# Allegro board pc049a_4lemos_02.brd
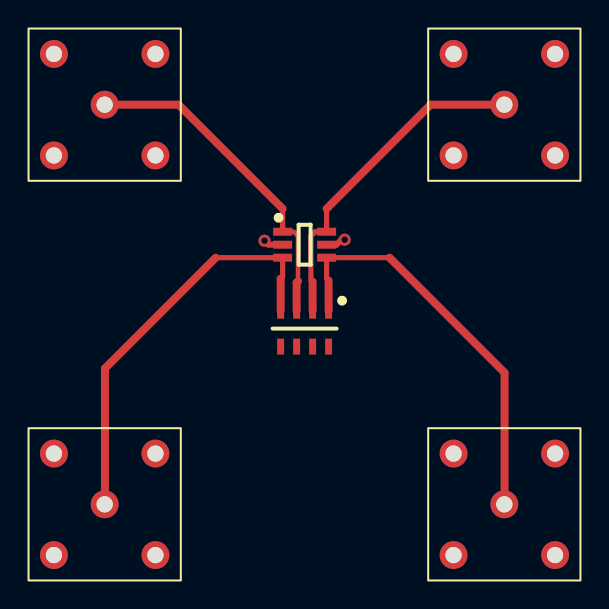
[diagram p0: board, top side]
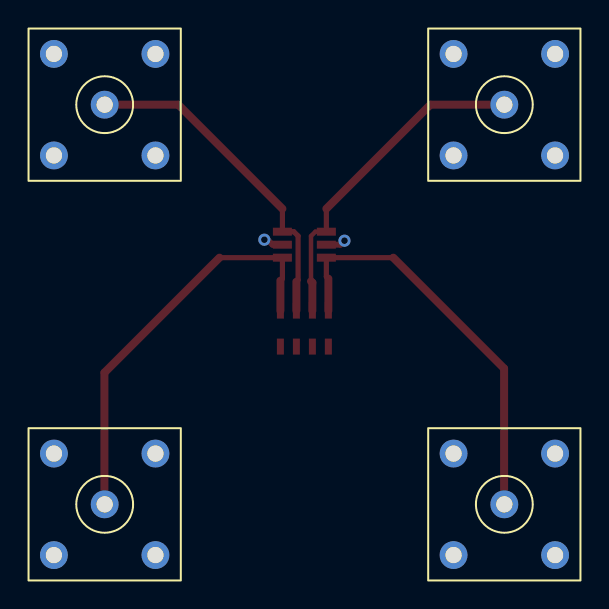
[diagram p1: board, bottom side, seen from below]

No outline. copper layers: TOP, L2, L3, L4, L5, BOTTOM. Coordinates in mm from the lowest, leftmost part position.

## Design rules (mm)
net group ANALOG_IN: nets ANALOG_IN<0> ANALOG_IN<1> ANALOG_IN<2> ANALOG_IN<3>

## Placement (name value [footprint] x y rotation side)
CN1  100nF/16V  [CAPCAF80P160X320X110-8N]  10 8.8 270 top
D1  -  [SOT65P210X110-6N]  10 13 0 top
PX1  -  [PLEMOD80]  0 0 180 bottom
PX2  -  [PLEMOD80]  0 20 180 bottom
PX3  -  [PLEMOD80]  20 20 180 bottom
PX4  -  [PLEMOD80]  20 0 180 bottom

## Library data of the parts
CN1 = CAPN4I: part number: CAPN4I-100NF,16V,X7R,CKCA43
D1 = PRTR5V0U4Y
PX1-PX4 = COAX: part number: COAX-PLEMO00D

## Footprints (pads in the part's own frame, mm; a bottom-side part is the same pattern mirrored in y, then rotated)
CAPCAF80P160X320X110-8N
  rect 0.8x0.35 smd: 1(-0.9,1.2) 2(0.9,1.2) 3(-0.9,0.4) 4(0.9,0.4) 5(-0.9,-0.4) 6(0.9,-0.4) 7(-0.9,-1.2) 8(0.9,-1.2)
PLEMOD80
  round 1.397 hole 0.813: 1(0.006,0.007) 2(-2.534,-2.533) 3(2.546,-2.533) 4(2.546,2.547) 5(-2.534,2.547)
SOT65P210X110-6N
  rect 0.95x0.4 smd: 1(-1.1,0.65) 2(-1.1,0) 3(-1.1,-0.65) 4(1.1,-0.65) 5(1.1,0) 6(1.1,0.65)

## Nets
GND_SIGNAL: D1.2(GND) D1.5(VCC) PX1.2(B<0>) PX1.3(B<1>) PX1.4(B<2>) PX1.5(B<3>) PX2.2(B<0>) PX2.3(B<1>) PX2.4(B<2>) PX2.5(B<3>) PX3.2(B<0>) PX3.3(B<1>) PX3.4(B<2>) PX3.5(B<3>) PX4.2(B<0>) PX4.3(B<1>) PX4.4(B<2>) PX4.5(B<3>)
ANALOG_IN<0>: CN1.8(B<0>)
ANALOG_IN<1>: CN1.6(B<0>)
ANALOG_IN<2>: CN1.4(B<0>)
ANALOG_IN<3>: CN1.2(B<0>)
UNNAMED_1_CAPN4I_I10_A: CN1.1(A<0>) D1.4(ESD3) PX4.1(A)
UNNAMED_1_CAPN4I_I10_A_1: CN1.3(A<0>) D1.6(ESD4) PX3.1(A)
UNNAMED_1_CAPN4I_I10_A_2: CN1.5(A<0>) D1.1(ESD1) PX2.1(A)
UNNAMED_1_CAPN4I_I10_A_3: CN1.7(A<0>) D1.3(ESD2) PX1.1(A)

## Via types
v1: diameter 0.61, hole 0.33, TOP to BOTTOM, 2 vias

## Routing (per net, layer and track width the routed paths; a pad name or vN(x,y) marks a point on that pad's centre or on a via; arc(x,y) is an arc through that point)
GND_SIGNAL: length 2
  TOP w0.3: v1(7.99,13.2) 8,13.2 8.2,13 D1.2 ; D1.5 11.59,13 11.84,13.25 v1(12,13.25)
UNNAMED_1_CAPN4I_I10_A: length 20.6
  TOP w0.226: PX4.1 20.01,0.01
  TOP w0.26: 14.25,12.35 D1.4 11.1,11.3 11.2,11.2
  TOP w0.4: 20.01,0.01 20.01,6.59 14.25,12.35 ; CN1.1 11.2,11.2
UNNAMED_1_CAPN4I_I10_A_1: length 16.9
  TOP w0.226: 10.65,13.65 D1.6
  TOP w0.26: 10.4,11.14 10.31,11.23 10.31,13.44 10.53,13.65 10.65,13.65 ; 11.1,14.8 D1.6
  TOP w0.4: CN1.3 10.4,11.14 ; 11.1,14.8 16.31,20.01 PX3.1 20.01,20.01
UNNAMED_1_CAPN4I_I10_A_2: length 16.8
  TOP w0.226: PX2.1 0.01,20.01 ; 9.67,11.17 9.67,13.43 9.45,13.65 D1.1
  TOP w0.26: 8.9,14.8 D1.1
  TOP w0.4: 0.01,20.01 3.69,20.01 8.9,14.8 ; CN1.5 9.6,11.1 9.67,11.17
UNNAMED_1_CAPN4I_I10_A_3: length 20.7
  TOP w0.226: PX1.1 0.01,0.01
  TOP w0.26: 5.55,12.35 D1.3 8.9,11.4 8.8,11.3
  TOP w0.4: 0.01,0.01 0.01,6.81 5.55,12.35 ; CN1.7 8.8,11.3
